# Altium PCB MachIn.PcbDoc
Units mm, origin at the board's own origin, x right, y up, seen from the top; angles counter-clockwise.
Board outline 150.11 x 123.44 mm, 2 copper layers (Top Layer, Bottom Layer); 73 components, 77 nets, 296 pads, 0 vias.
Unrouted connection lines stored in the file: 131.
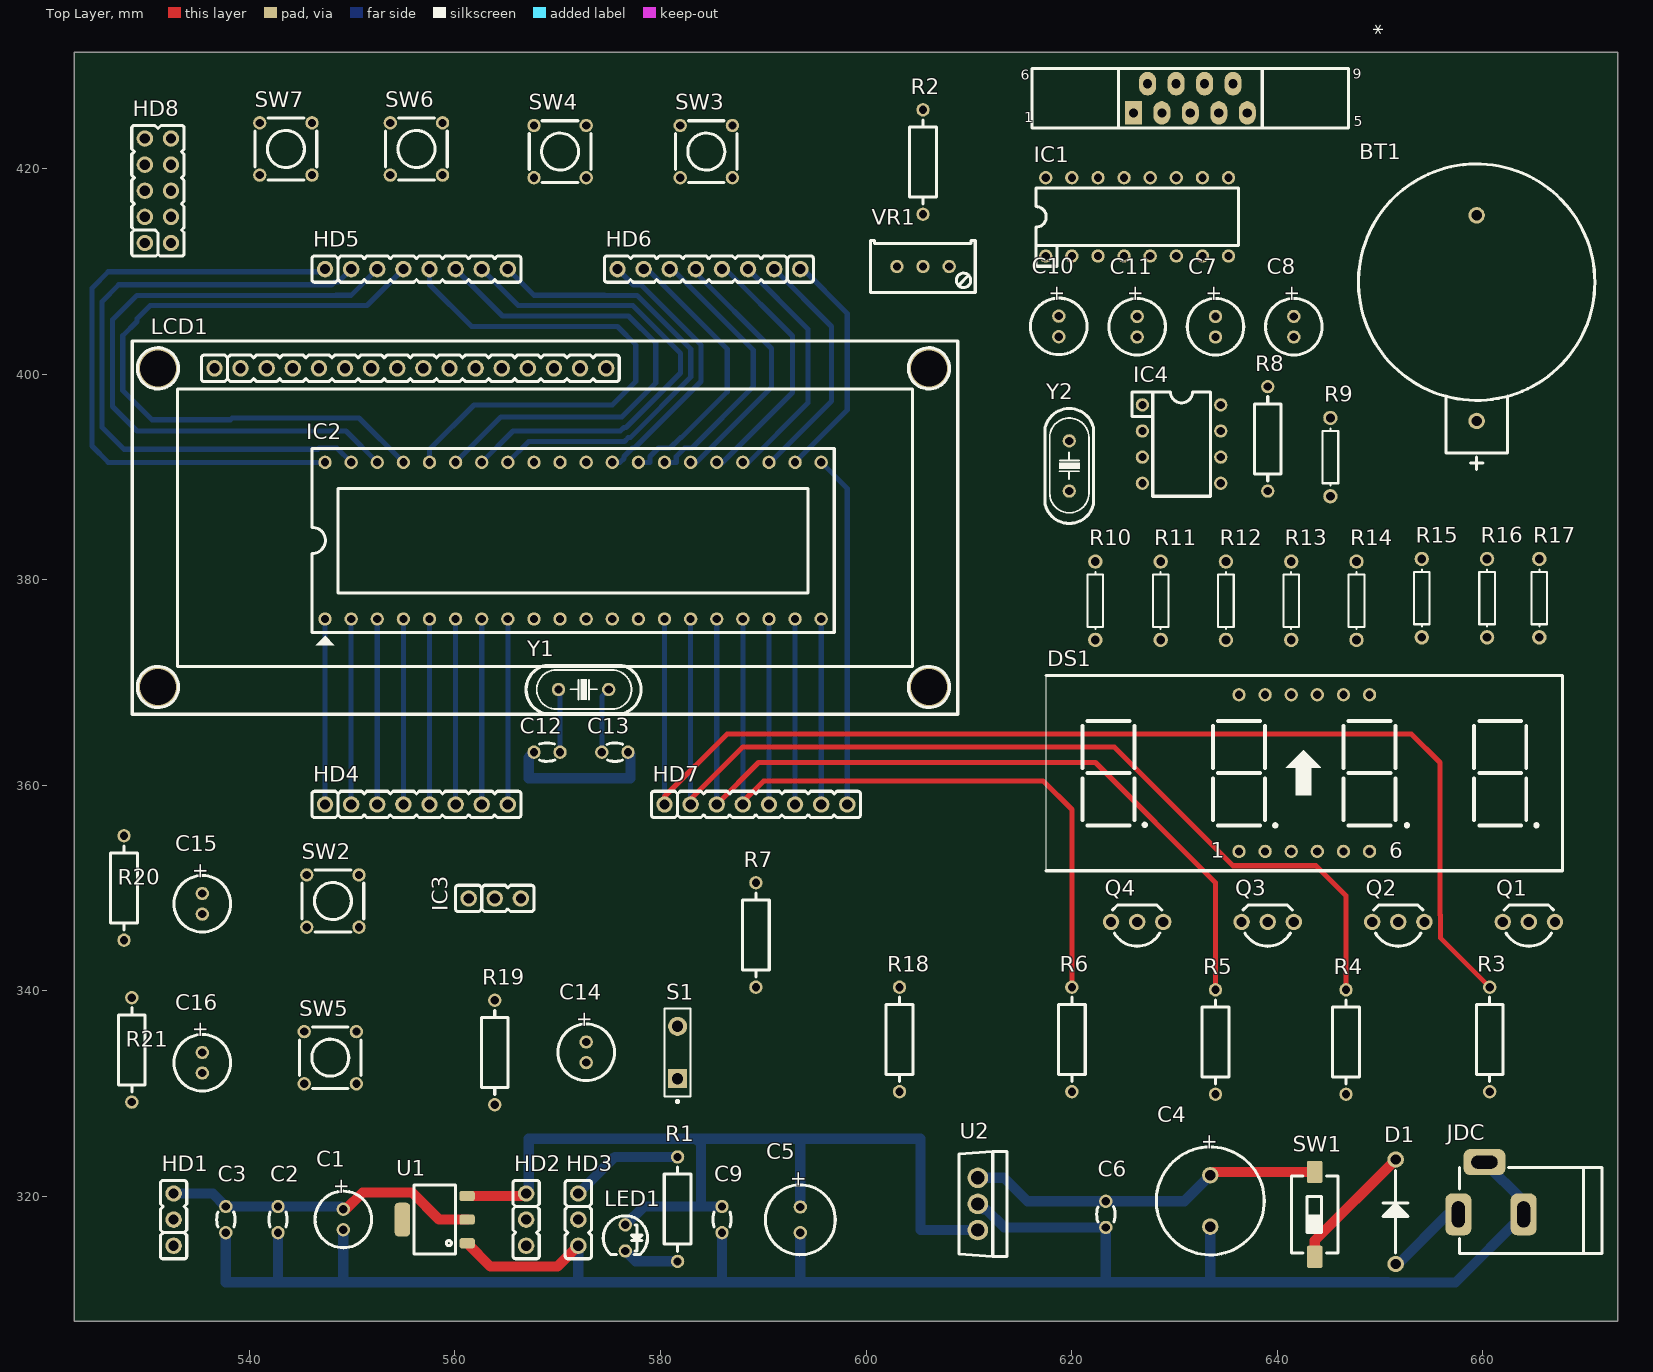
[diagram p0: Top Layer view]
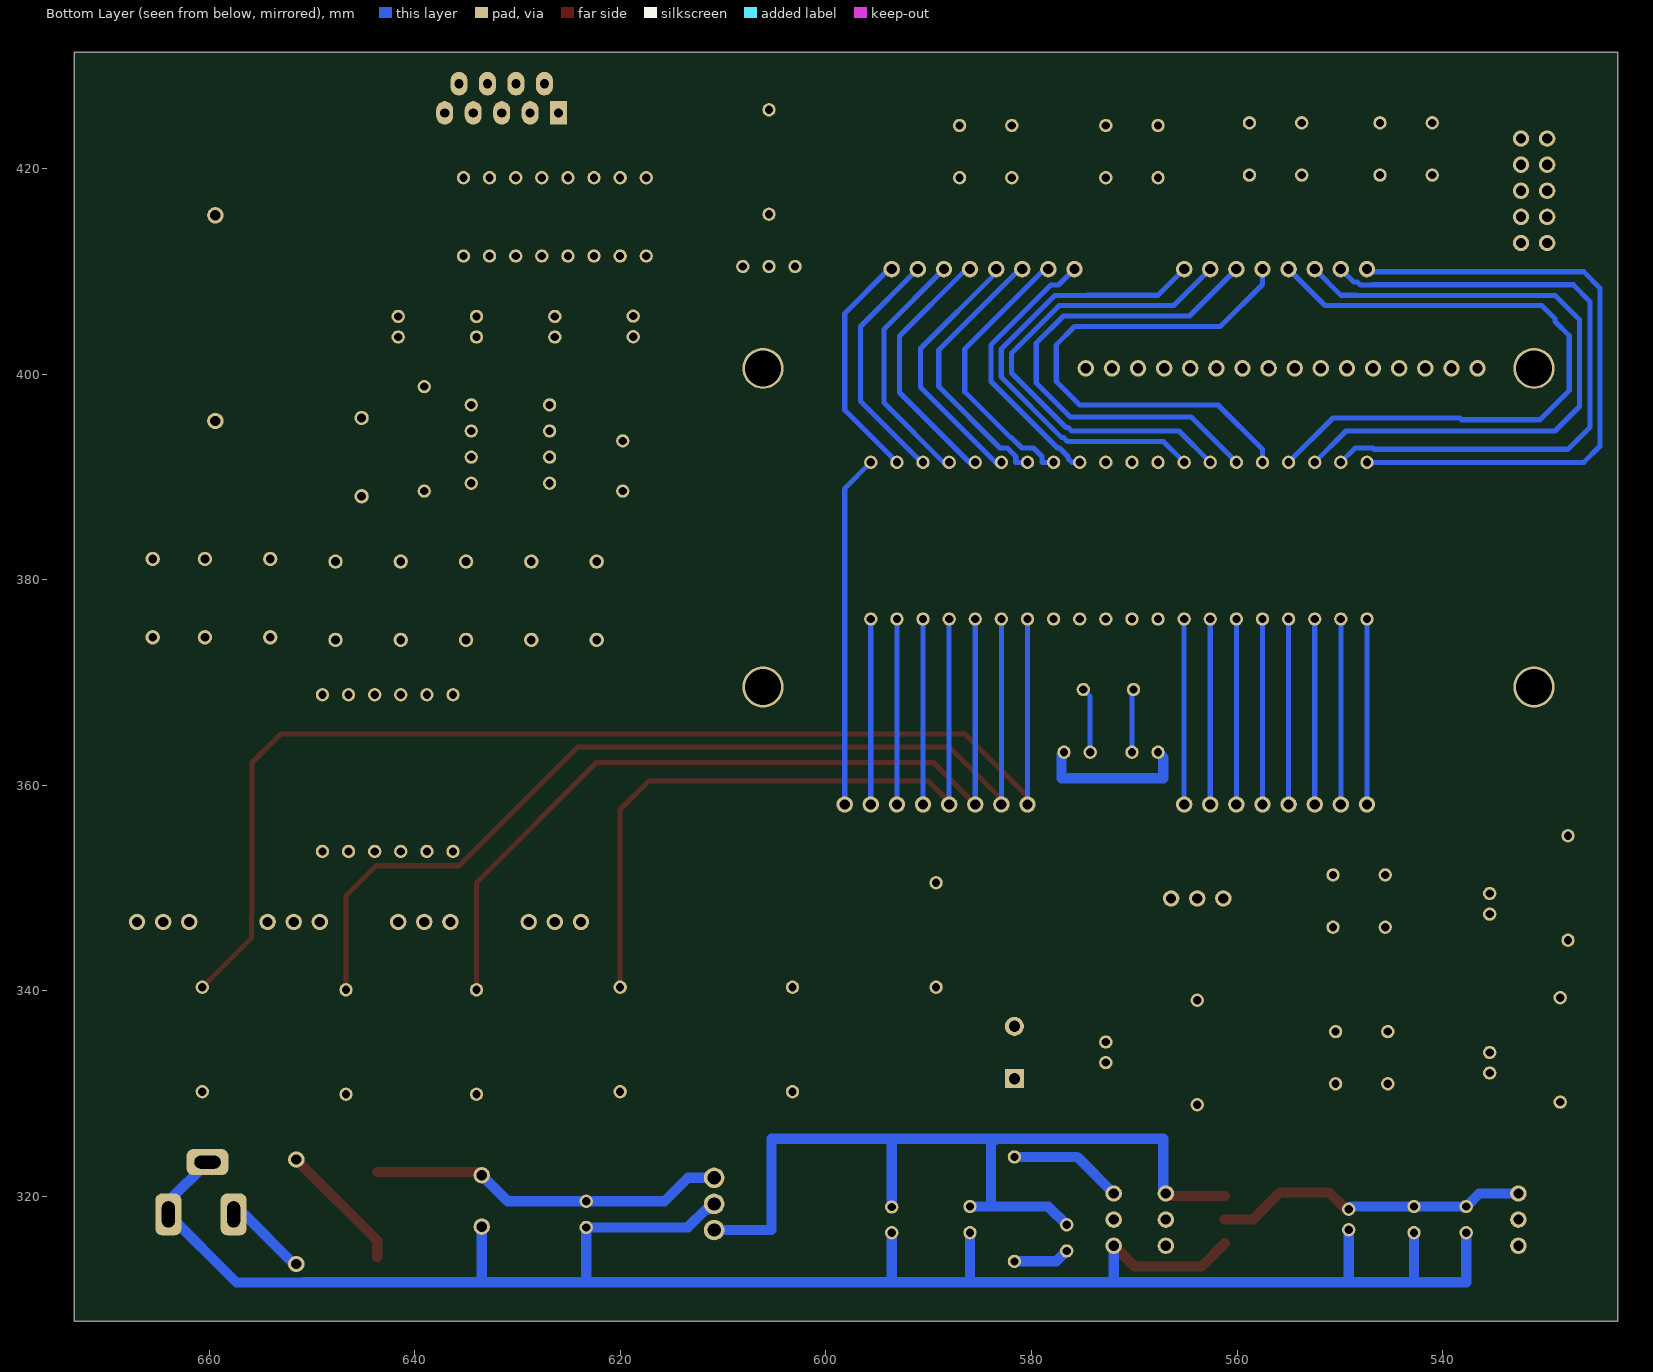
[diagram p1: Bottom Layer view, seen from below]

## Layer stack, top to bottom
Top Solder: solder mask 0.0102, Solder Resist, Dk 3.5
Top Layer: signal copper 0.0356
Dielectric 1: dielectric 0.32, FR-4, Dk 4.8
Bottom Layer: signal copper 0.0356
Bottom Solder: solder mask 0.0102, Solder Resist, Dk 3.5

## Board outline
522.986,307.848 673.1,307.848 673.1,431.292 522.986,431.292

## Design rules (kind name [scope] priority, off if disabled: settings)
Clearance [All] p1: gap=0.5 ignorepadtopadclearanceinfootprint=FALSE
PolygonConnect [All] p1: connectstyle=Relief reliefconductorwidth=0.254 reliefentries=4 polygonreliefangle="90 Angle" airgapwidth=0.254
RoutingVias Via_Power [InNetClass('Net_Power')] p1: holewidth=0.6 width=1.1 viastyle="Through Hole" minholewidth=0.6 minwidth=1.1 maxholewidth=0.6 maxwidth=1.1
RoutingVias Via_Signal [InNetClass('Net_Signal')] p2: holewidth=0.4 width=0.7 viastyle="Through Hole" minholewidth=0.4 minwidth=0.7 maxholewidth=0.4 maxwidth=0.7
SolderMaskExpansion [All] p1: expansion=0.102
Width Net_Signal [InNetClass('Net_Signal')] p1: maxlimit=2 minlimit=0.5 preferedwidth=0.5
Width Net_Power [InNetClass('Net_Power')] p2: maxlimit=2 minlimit=1 preferedwidth=1
Width Default [All] p3: maxlimit=2 minlimit=1 preferedwidth=1
30 further rules are at their usual default settings.

## Classes and differential pairs
net class Net_Signal: MISO MOSI Net*_2 Net*_3 NetBT1_1 NetC4_1 NetC7_1 NetC7_2 NetC8_1 NetC8_2 NetC10_1 NetC11_2 NetC15_1 NetC16_1 NetD1_1 NetD1_2 NetDS1_1 NetDS1_2 NetDS1_3 NetDS1_4 NetDS1_5 NetDS1_6 NetDS1_7 NetDS1_8 NetDS1_9 NetDS1_10 NetDS1_11 NetDS1_12 NetIC3_4 NetIC4_1 NetIC4_2 NetLCD1_3 NetLCD1_15 NetLED1_2 NetQ1_3 NetQ2_3 NetQ3_3 NetQ4_3 PA0 PA1 PA2 PA3 PA4 PA5 PA6 PA7 PB0 PB1 PB2 PB3 PB4 PB5 PB6 PB7 PC2 PC3 PC4 PC5 PC6 PC7 PD4 PD5 PD6 PD7 RESET RXD SCK SCL SDA TXD XTAL1 XTAL2
net class Net_Power: 3.3V GND VCC

## Components (designator, comment, footprint, x,y, rotation, side; value= is the part's Value field where it differs from the comment)
* "COM" "DSB 9-F FIX" 631.535,426.824 r0 top
BT1 "PIN 3V" BS_3_Battery_holder 659.384,408.94 r0 top
C1 "10uF" CAP_10UF_16V 549.148,318.77 r270 top value=10uF/50V
C2 "104" "Tu gom 104" 542.798,317.754 r90 top value=0.1uF
C3 "104" "Tu gom 104" 537.718,317.754 r90 top value=0.1uF
C4 "470uF/50V" CAP_470UF_50V 633.476,322.072 r270 top value=220uF/450V
C5 "100uF" CAP_100UF_25V 593.598,318.984 r270 top value="47uF/16 - 50V"
C6 "5AK102KABAA" "Tu gom 104" 623.316,318.262 r90 top value=104
C7 "10uF" CAP_10UF_50V 633.984,405.606 r270 top value=10uF/50V
C8 "10uF" CAP_10UF_50V 641.604,405.606 r270 top value=10uF/50V
C9 "5AK102KABAA" "Tu gom 104" 585.978,317.754 r90 top value=104
C10 "10uF" CAP_10UF_50V 618.744,405.638 r270 top value=10uF/50V
C11 "10uF" CAP_10UF_50V 626.364,405.606 r270 top value=10uF/50V
C12 "5AK102KABAA" "Tu 33p" 567.69,363.22 r0 top value=22pF
C13 "5AK102KABAA" "Tu 33p" 576.834,363.22 r180 top value=22pF
C14 "1uF" CAP_1UF_50V 572.77,335.026 r270 top value=10uF/50V
C15 "10uF" CAP_10UF_16V 535.432,349.472 r270 top value=10uF/50V
C16 "10uF" CAP_10UF_16V 535.432,334.01 r270 top value=10uF/50V
D1 "1N4007" 1N4007 651.51,313.436 r90 top
DS1 "7SEGQ" 7SEG_4DIGIT 636.27,353.568 r0 top value="LED 7Q SEG"
HD1 "Header 3" Header_3 532.638,317.754 r90 top
HD2 "Header 3" Header_3 566.928,317.754 r270 top
HD3 "Header 3" Header_3 572.008,317.754 r270 top
HD4 "Header 8" Header_8 556.26,358.14 r0 top
HD5 "Header 8" Header_8 556.26,410.21 r0 top
HD6 "Header 8" Header_8 584.708,410.21 r180 top
HD7 "Header 8" Header_8 589.28,358.14 r0 top
HD8 "Header 5x2" HeaderSP_5x2 531.114,417.83 r90 top
IC1 "MAX232" 74HC4017 617.474,411.48 r0 top
IC2 "ATMEGA 16A" PIC16F877A 547.37,376.174 r0 top value="Atmega 16L"
IC3 "DS18B20" Header_FM_3 563.88,348.996 r0 top
IC4 "DS1307" DS1307 626.872,397.002 r270 top
JDC "Jac DC" DC-IN 660.781,320.802 r180 top
LCD1 "LCD 16x2A" LCD16x2 536.614,400.558 r0 top value=LCD16x2A
LED1 "LED_R_3" LED3R 576.58,317.246 r270 top
Q1 "C1815" 2SA1015 664.464,346.71 r180 top
Q2 "C1815" 2SA1015 651.764,346.71 r180 top
Q3 "C1815" 2SA1015 639.064,346.71 r180 top
Q4 "C1815" 2SA1015 626.364,346.71 r180 top
R1 "220" "RES 1/4W CFR25" 581.66,323.85 r270 top value="R1/4W - 1K"
R2 "220" "RES 1/4W CFR25" 605.536,425.704 r270 top value="R1/4W - 1K"
R3 "10k" "RES 1/4W CFR25" 660.654,330.2 r90 top value="R1/4W - 1K"
R4 "10k" "RES 1/4W CFR25" 646.684,329.946 r90 top value="R1/4W - 1K"
R5 "10k" "RES 1/4W CFR25" 633.984,329.946 r90 top value="R1/4W - 1K"
R6 "10k" "RES 1/4W CFR25" 620.014,340.36 r270 top value="R1/4W - 1K"
R7 "10k, 1/4W" "RES 1/4W CFR25" 589.28,340.36 r90 top value="R1/4W - 1K"
R8 "CF1/4W1KJ25" "RES 1/4W CFR25" 639.064,388.62 r90 top value="4.7K, 1/4W"
R9 "CF1/4W1KJ25" AXIAL-0.3 645.16,391.922 r90 top value="4.7K, 1/4W"
R10 "CF1/4W1KJ25" AXIAL-0.3 622.3,377.952 r90 top value=220
R11 "CF1/4W1KJ25" AXIAL-0.3 628.65,377.952 r90 top value=220
R12 "CF1/4W1KJ25" AXIAL-0.3 635,377.952 r90 top value=220
R13 "CF1/4W1KJ25" AXIAL-0.3 641.35,377.952 r90 top value=220
R14 "CF1/4W1KJ25" AXIAL-0.3 647.7,377.952 r90 top value=220
R15 "CF1/4W1KJ25" AXIAL-0.3 654.05,378.206 r90 top value=220
R16 "CF1/4W1KJ25" AXIAL-0.3 660.4,378.206 r90 top value=220
R17 "CF1/4W1KJ25" AXIAL-0.3 665.48,378.206 r270 top value=220
R18 "10k" "RES 1/4W CFR25" 603.25,330.2 r90 top value="R1/4W - 1K"
R19 "CF1/4W220KJ25" "RES 1/4W CFR25" 563.88,328.93 r90 top value=220K
R20 "CF1/4W1KJ25" "RES 1/4W CFR25" 527.812,344.932 r90 top value="1K, 1/4W"
R21 "CF1/4W1KJ25" "RES 1/4W CFR25" 528.574,329.184 r90 top value="1K, 1/4W"
S1 "SW-PB" SPST-2 581.66,334.01 r90 top
SW1 "SW6S" SMD_DIP_Switch1 643.636,318.262 r90 top value=SW6
SW2 "SW" "BUTTON 4 PIN" 548.132,348.742 r0 top value="Button chip 4 pin"
SW3 "SW" "BUTTON 4 PIN" 584.454,421.64 r0 top value="Button chip 4 pin"
SW4 "SW" "BUTTON 4 PIN" 570.23,421.64 r0 top value="Button chip 4 pin"
SW5 "SW" "BUTTON 4 PIN" 547.878,333.502 r0 top value="Button chip 4 pin"
SW6 "SW" "BUTTON 4 PIN" 556.26,421.894 r0 top value="Button chip 4 pin"
SW7 "SW" "BUTTON 4 PIN" 543.56,421.894 r0 top value="Button chip 4 pin"
U1 "AMS1117-3V3" AMS1117-3.3V 558.038,317.754 r180 top
U2 "LM7805" LM7805 610.87,319.278 r270 top
VR1 "10K" VR1 608.076,410.464 r180 top value="VR 10K"
Y1 "16MHz" CRYSTAL 572.516,369.316 r180 top
Y2 "CRYSTAL_32.768KHz" CRYSTAL 619.76,391.06 r270 top

## Footprints (in the part's own frame and the unit in brackets; to place one, negate y for a bottom-side part, rotate by r counter-clockwise, add the part's x,y. Pads: shape width x height; smd on the part's side, far side on the other; paste and mask are expansions set on the pad)
1N4007 [mm] "DIODE_DIP"
  round 1.6 hole 1 mask+0.1: 1(0,0) 2(10.16,0)
  silkscreen extent 1.08,-1.2 9.08,1.21, body extent -0.72,-1.25 10.88,1.25, height 2.75
2SA1015 [mm] "TO-92 Bent Lead, Body Dia. 4.5mm; Leads 0.51 x 0.48 mm (max)"
  round 1.6 hole 1 mask+0.1: 1(-2.54,0) 2(0,0)
  round 1.6 hole 1: 3(2.54,0)
  silkscreen extent -2.41,-1.65 2.41,2.37, body extent -2.79,-1.59 2.79,2.61, height 10
7SEG_4DIGIT [mm] "DIP 12 Leads; Body 50.2 x 19 mm; Pitch 2.54mm"
  round 1.3 hole 0.8: 1(0,0) 2(2.54,0) 3(5.08,0) 4(7.62,0) 5(10.16,0) 6(12.7,0) 7(12.7,15.24) 8(10.16,15.24) 9(7.62,15.24) 10(5.08,15.24) 11(2.54,15.24) 12(0,15.24)
  silkscreen extent -18.75,-1.88 31.45,17.12, body extent -18.75,-1.88 31.55,17.12, height 14.35
74HC4017 [mm] "DIP 16, 16 PIN, W 7.62, Pin to pin 2.54MM"
  round 1.3 hole 0.8: 1(0,0) 2(2.54,0) 3(5.08,0) 4(7.62,0) 5(10.16,0) 6(12.7,0) 7(15.24,0) 8(17.78,0) 9(17.78,7.62) 10(15.24,7.62) 11(12.7,7.62) 12(10.16,7.62) 13(7.62,7.62) 14(5.08,7.62) 15(2.54,7.62) 16(0,7.62)
  silkscreen extent -0.95,-0.99 18.73,6.61, body extent -1.41,-0.07 19.19,7.69, height 4.5
AMS1117-3.3V [mm] "SOT223, 4-Leads, Body 6.7x7.3mm (max), Pitch 2.30mm, IPC Medium Density"
  rrect50% 1.5x1 smd: 1(-3.15,2.3) 2(-3.15,0) 3(-3.15,-2.3)
  rrect50% 1.5x3.28 smd: 4(3.15,0)
  silkscreen extent -2.03,-3.35 2.03,3.35
AXIAL-0.3 [mm] "Axial Device, Thru-Hole; 2 Leads; 0.3 in Pin Spacing"
  round 1.4 hole 0.85: 1(-3.81,0) 2(3.81,0)
  silkscreen extent -2.77,-0.76 2.77,0.76
BS_3_Battery_holder [mm]
  round 1.6 hole 1 mask+0.1: 1(0,-13.5) 2(0,6.5)
  silkscreen extent -11.5,-18.2 11.5,11.5, body extent -11.4,-17.25 11.35,11.45, height 7.07
"BUTTON 4 PIN" [mm]
  round 1.3 hole 0.8: 1(-2.54,2.54) 2(2.54,2.54) 3(-2.54,-2.54) 4(2.54,-2.54)
  silkscreen extent -3,-3 3,3
CAP_1UF_50V [mm] "Capacitor, Electrolytic, Radial; Body 5 x 11 mm (Dia.xH typ); Pin Spacing 2 mm (typ)"
  round 1.3 hole 0.8: 1(0,0) 2(2,0)
  silkscreen extent -1.75,-2.75 3.75,2.75, body extent -1.53,-2.53 3.53,2.53, height 11.53
CAP_10UF_16V [mm] "Capacitor, Electrolytic, Radial; Body 5 x 11 mm (Dia.xH typ); Pin Spacing 2 mm (typ)"
  round 1.3 hole 0.8: 1(0,0) 2(2,0)
  silkscreen extent -1.75,-2.75 3.75,2.75, body extent -1.53,-2.53 3.53,2.53, height 11.53
CAP_10UF_50V [mm] "Capacitor, Electrolytic, Radial; Body 5 x 11 mm (Dia.xH typ); Pin Spacing 2 mm (typ)"
  round 1.3 hole 0.8: 1(0,0) 2(2,0)
  silkscreen extent -1.75,-2.75 3.75,2.75, body extent -1.53,-2.53 3.53,2.53, height 11.53
CAP_100UF_25V [mm] "Capacitor, Electrolytic, Radial; Body 6.3 x 11.2 mm (Dia.xH typ); Pin Spacing 2.5 mm (typ)"
  round 1.3 hole 0.8: 1(0,0) 2(2.5,0)
  silkscreen extent -2.15,-3.4 4.65,3.4, body extent -1.93,-3.18 4.43,3.18, height 11.53
CAP_470UF_50V [mm] "Capacitor, Electrolytic, Radial; Body 10 x 20 mm (Dia.xH typ); Pin Spacing 5 mm (typ)"
  round 1.6 hole 1: 1(0,0) 2(5,0)
  silkscreen extent -2.75,-5.25 7.75,5.25, body extent -2.53,-5.03 7.53,5.03, height 16.53
CRYSTAL [mm] "Quartz Crystal, Thru-Hole; 2 Leads; Body 11.35 x 4.65 x 13.46 mm (LxWxH max)"
  round 1.3 hole 0.8 mask+0.1: 1(-2.44,0) 2(2.44,0)
  silkscreen extent -5.59,-2.35 5.59,2.35, body extent -5.49,-2.25 5.49,2.25, height 3.6
DC-IN [mil] "Jac DC input"
  rrect50% 100x160 hole 50 slot 100 at 90 deg: 1(125,100) 2(-125,100)
  rrect50% 160x100 hole 50 slot 100 at 0 deg: 3(25,-100)
  silkscreen extent -425,-80 120,250, body extent -410,-105 134,269, height 434
DS1307 [mm] "DIP 8, 8 PIN, W 7.62, Pin to pin 2.54MM"
  round 1.3 hole 0.8: 1(0,0) 2(2.54,0) 3(5.08,0) 4(7.62,0) 5(7.62,7.62) 6(5.08,7.62) 7(2.54,7.62) 8(0,7.62)
  silkscreen extent -1.27,-0.99 8.89,6.61, body extent -1.14,-0.1 8.76,7.72, height 4.57
"DSB 9-F FIX" [mil] "COM FMALE - D Subminiature; 9 Position; Right Angle; Pitch 1.385 mm"
  rect 65x90 hole 35: 1(-218.11,-55.91)
  oval 65x90 hole 35: 2(-109.05,-55.91) 3(0,-55.91) 4(109.06,-55.91) 5(218.11,-55.91) 6(-163.58,55.91) 7(-54.53,55.91) 8(54.53,55.91) 9(163.58,55.91)
  silkscreen extent -606,-114 606,114, body extent -604,-138 608,613, height 495
Header_3 [mm] "Connector DIP, 3Pin_2.54mm"
  round 1.6 hole 1 mask+0.1: 1(-2.54,0) 2(0,0) 3(2.54,0)
  silkscreen extent -3.81,-1.28 3.81,1.28, body extent -3.81,-1.27 3.81,1.27, height 10.1
Header_8 [mm] "Connector DIP Male, 8Pin_2.54mm"
  round 1.6 hole 1 mask+0.1: 1(-8.89,0) 2(-6.35,0) 3(-3.81,0) 4(-1.27,0) 5(1.27,0) 6(3.81,0) 7(6.35,0) 8(8.89,0)
  silkscreen extent -10.16,-1.28 10.16,1.28, body extent -10.16,-1.27 10.16,1.27, height 10.1
Header_FM_3 [mm] "Connector DIP, 3Pin_2.54mm"
  round 1.6 hole 1 mask+0.1: 1(-2.54,0) 2(0,0) 3(2.54,0)
  silkscreen extent -3.81,-1.28 3.81,1.28
HeaderSP_5x2 [mm] "Connector DIP FeMale, 2x5Pin_2.54mm"
  round 1.6 hole 1 mask+0.1: 1(-5.08,1.27) 2(-2.54,1.27) 3(0,1.27) 4(2.54,1.27) 5(5.08,1.27) 6(-5.08,-1.27) 7(-2.54,-1.27) 8(0,-1.27) 9(2.54,-1.27) 10(5.08,-1.27)
  silkscreen extent -6.35,-2.55 6.35,2.55
LCD16x2 [mm] "LCD 16x2, 36.3mmx80.3mm"
  round 1.6 hole 1 mask+0.1: 1(0,0) 2(2.54,0) 3(5.08,0) 4(7.62,0) 5(10.16,0) 6(12.7,0) 7(15.24,0) 8(17.78,0) 9(20.32,0) 10(22.86,0) 11(25.4,0) 12(27.94,0) 13(30.48,0) 14(33.02,0) 15(35.56,0) 16(38.1,0)
  round 4 hole 3.5: Hole_0(-5.5,0) Hole_1(-5.5,-31) Hole_3(69.5,-31) Hole_4(69.5,0)
  silkscreen extent -8,-33.65 72.3,2.65, body extent -8.25,-33.75 72.25,2.75, height 10.52
LED3R [mm] "LED 3mm_RED"
  round 1.3 hole 0.8: 1(0,0) 2(2.54,0)
  silkscreen extent -0.88,-2.15 2.87,2.15, body extent -0.73,-2 2.94,2, height 4.6
LM7805 [mm] "POWER IC 7805"
  round 2 hole 1.3: 1(-2.54,0) 2(0,0) 3(2.54,0)
  silkscreen extent -5.1,-1.85 5.1,2.85, body extent -5.56,-1.63 5.65,3.06, height 19.17
PIC16F877A [mm] "40 PIN, W 15.24mm, Pin to pin 2.54mm"
  round 1.3 hole 0.8: 1(0,0) 2(2.54,0) 3(5.08,0) 4(7.62,0) 5(10.16,0) 6(12.7,0) 7(15.24,0) 8(17.78,0) 9(20.32,0) 10(22.86,0) 11(25.4,0) 12(27.94,0) 13(30.48,0) 14(33.02,0) 15(35.56,0) 16(38.1,0) 17(40.64,0) 18(43.18,0) 19(45.72,0) 20(48.26,0) 21(48.26,15.24) 22(45.72,15.24) 23(43.18,15.24) 24(40.64,15.24) 25(38.1,15.24) 26(35.56,15.24) 27(33.02,15.24) 28(30.48,15.24) 29(27.94,15.24) 30(25.4,15.24) 31(22.86,15.24) 32(20.32,15.24) 33(17.78,15.24) 34(15.24,15.24) 35(12.7,15.24) 36(10.16,15.24) 37(7.62,15.24) 38(5.08,15.24) 39(2.54,15.24) 40(0,15.24)
  silkscreen extent -1.28,-2.54 49.54,16.58, body extent -2.08,-0.12 50.37,15.37, height 5.7
"RES 1/4W CFR25" [mm] "Axial Device, Thru-Hole; 2 Leads fi 0.55"
  round 1.3 hole 0.8 mask+0.1: 1(0,0) 2(10.16,0)
  silkscreen extent 0.98,-1.3 9.18,1.3, body extent -0.3,-1.16 10.47,1.16, height 2.93
SMD_DIP_Switch1 [mm] "SMD DIP Switch 2pin, 2.54mm"
  rrect20% 2.15x1.5 smd mask+0.1: 1(-4.125,0) 2(4.125,0)
  silkscreen extent -3.74,-2.26 3.74,2.26
SPST-2 [mm] "Switch; 2 Leads"
  rect 1.85x1.85 hole 1.1: 1(-2.54,0)
  round 1.85 hole 1.1: 2(2.54,0)
  silkscreen extent -4.89,-1.27 4.28,1.27
"Tu 33p" [mm] "Capacitor, Radial, Tantalum, Non-Polarised; Body 3.05 x 1.78 x 3.43 mm (WxTxH max); Pin Spacing 2.54 mm (typ)"
  round 1.3 hole 0.8: 1(0,0) 2(2.54,0)
  silkscreen extent 0.54,-0.89 2.03,0.89, body extent -1.65,-0.85 4.19,0.85, height 6.42
"Tu gom 104" [mm] "Capacitor, Radial, Tantalum, Non-Polarised; Body 3.05 x 1.78 x 3.43 mm (WxTxH max); Pin Spacing 2.54 mm (typ)"
  round 1.3 hole 0.8: 1(-1.27,0) 2(1.27,0)
  silkscreen extent -0.73,-0.89 0.76,0.89, body extent -2.92,-0.85 2.92,0.85, height 6.42
VR1 [mm] "Variable Resistor"
  round 1.3 hole 0.8 mask+0.1: 1(0,0) 2(2.54,0) 3(5.08,0)
  silkscreen extent -2.54,-2.54 7.65,2.54, body extent -2.22,-3.3 7.3,2.79, height 11.56

## Part data
BT1: "Battery 3VDC"
C1 C7 C8 C10 C11 C14 C15 C16: library part CP1, "Cap P  0,1uF < 22uF , 16 - 50V", Description 1="10 => 220uF/6,3V/10V - 10uF => 100uF/16V", Description 2="0,1uF => 33uF/50V - 10uF => 22uF/63V", Description 3="0,47uF => 10uF/100V"
C2 C3: library part CN2, "Cap np 104 => 105pF"
C4: library part CP8, "Cap 4700uF/50V"
C5: library part CP2, "C 47uF/50V , 220uF/16V", Description 1="470uF/6,3V - 330uF/10V - 220uF/16V", Description 2="100uF/25V - 35V - 47uF/50V - 22uF/100V", Description 3="33uF => 47uF/63V - 1uF => 4,7uF/160V", Description 4="1uF => 2,2uF/250V - 1uF/350V"
C6 C9 C12 C13: "CAP NPO CAPNTO 1nF 100V 10%", ComponentLink1Description=Datasheet, ComponentLink1URL="D:\Dropbox\Datasheets\Passive Components\Capacitors\AVX Disc Ceramic Capacitors.pdf", Unit Price=0.003
D1: "Diode LS 1A 1000V DO-41", ComponentLink1Description=Datasheet, ComponentLink1URL="D:\Dropbox\Datasheets\Diodes and Rectifiers\Diodes\1N400X.pdf", Unit Price=0.0072
DS1: library part LED7Q, "Four 7 Seg Dipslay"
HD1 HD2 HD3: library part Hed3, "Header 3 (Green)"
HD4 HD5 HD6 HD7: library part HED8V, "Header 8 Vit Broad"
HD8: library part HED5x2
IC1: "Dual EIA-232 Driver/Receiver"
IC2: library part Atmega16L, "8-Bit AVR Microcontroller with 16K Bytes of In-System Programmable Flash Memory"
IC3: library part DS18S20, "High Precision  1-Wire® Digital Thermometer"
IC4: "Real Timer Serial"
JDC: library part DCIN, "Jac DC input"
LCD1: library part LCD16x2A, "LCD dipslay 16 char, 2 line"
LED1: library part LED_RED_3MM, "LED Red 3mm", ComponentLink1Description=Datasheet, ComponentLink1URL="D:\Dropbox\Datasheets\Opto and Illumination\LEDs\SMD LED.pdf", Unit Price=0.0476
Q1 Q2 Q3 Q4: "NPN 600mW, ECB", =C2383
R1 R2 R3 R4 R5 R6 R7 R18: library part R1/4W, "Resistor 1/4W"
R8 R9 R10 R11 R12 R13 R14 R15 R16 R17 R20 R21: "RES CF AXIAL-0.3 5% 1/4W 1K", ComponentLink1Description=Datasheet, ComponentLink1URL="D:\Dropbox\Datasheets\Passive Components\Resistors\Carbon Film Resistor.pdf", Unit Price=0.001
R19: "RES CF AXIAL-0.3 5% 1/4W 220K", ComponentLink1Description=Datasheet, ComponentLink1URL="D:\Dropbox\Datasheets\Passive Components\Resistors\Carbon Film Resistor.pdf", Unit Price=0.001
S1: "Switch", LatestRevisionDate=17-Jul-2002, LatestRevisionNote="Re-released for DXP Platform.", PackageDescription="Switch; 2 Leads", PackageReference=SPST-2, Published=24-Mar-1999, Publisher="Altium Limited"
SW1: "SW-DTDP - 6 Pin"
SW2 SW3 SW4 SW5 SW6 SW7: library part SW4, "Switch button 4 pin"
U1: "Linear Voltage Regulator 3.3V 1A 15V Max SOT-223", ComponentLink1Description=Datasheet, ComponentLink1URL="D:\Dropbox\Datasheets\Power Management ICs\Linear Regulators\AMS1117.pdf", Unit Price=0.2000
U2: "Linear Voltage Regulator 5V 1A 24V Max TO-220", ComponentLink1Description=Datasheet, ComponentLink1URL="D:\Dropbox\Datasheets\Power Management ICs\Linear Regulators\LM78XX.pdf", Unit Price=0.3000
VR1: library part VR, "Var Resistor"
Y1 Y2: library part XTAL_12MHz, "Crystal Oscillator", LatestRevisionDate=17-Jul-2002, LatestRevisionNote="Re-released for DXP Platform.", PackageDescription="Crystal, Thru-Hole; 2 Leads; Body 3.1 x 8.2 mm (Dia.xH)", PackageReference=R38, Published=8-Jun-2000, Publisher="Altium Limited"

## Nets (pads, with @x,y where several pads share a name; then routed paths per layer and width w, separated by ;. In a path a pad name is that pad's centre, name@x,y a point inside that pad or via, vN(x,y) a via of type N, cw(c..) or ccw(c..) an arc to the next point about the centre after c; other vN are vias at no path point)
3.3V: C1.1 C2.2 C3.2 HD1.1 HD1.2 HD1.3 U1.2 | length 30.9
  Top Layer w1: C1.1 549.402,318.77 551.026,320.394 555.833,320.394 558.473,317.754 U1.2
  Bottom Layer w1: HD1.3 536.448,320.294 C3.2 C2.2 548.894,319.024 C1.1
AREF: IC2.32
AVCC: IC2.30
GND: *.5 BT1.2 C1.2 C2.1 C3.1 C4.2 C5.2 C6.1 C9.1 C11.1 C12.1 C13.1 C14.2 C15.2 C16.2 HD3.1 HD3.2 HD3.3 HD7.3 HD7.4 HD8.4 HD8.6 HD8.8 HD8.10 IC1.15 IC2.11 IC2.16 IC2.17 IC2.31 IC4.4 JDC.2 JDC.3 LCD1.1 LCD1.16 R1.1 R5.2 R6.2 R19.1 S1.1 SW2.2 SW2.4 SW3.2 SW3.4 SW4.2 SW4.4 SW5.2 SW5.4 SW6.2 SW6.4 SW7.2 SW7.4 U1.1 U2.2 VR1.3 | length 329
  Top Layer w0.5: HD7.3 589.534,362.204 622.3,362.204 633.984,350.52 R5.2
  Top Layer w1: U1.1 563.46,313.182 569.976,313.182 HD3.3
  Bottom Layer w0.5: HD7.3 IC2.16 ; HD7.4 IC2.17
  Bottom Layer w1: C3.1 537.718,311.658 542.798,311.658 ; C2.1 542.798,311.658 ; C1.2 549.148,311.658 ; C12.1 567.182,362.712 567.182,360.68 577.088,360.68 577.088,362.966 C13.1 ; HD3.3 572.008,311.658 ; HD3.1 575.564,323.85 R1.1 ; C9.1 585.978,311.658 ; C5.2 593.598,311.658 ; U2.2 611.41,318.738 611.698,318.738 613.444,316.992 C6.1 623.316,311.658 ; C4.2@633.396,316.992 C4.2 633.476,311.658 ; JDC.3@660.527,323.723 JDC.3 663.956,319.532 JDC.2 657.33,311.636 650.764,311.636 650.742,311.658 633.476,311.658 ; 542.798,311.658 549.148,311.658 ; 549.148,311.658 572.008,311.658 ; 572.008,311.658 585.978,311.658 ; 585.978,311.658 593.598,311.658 ; 593.598,311.658 623.316,311.658 ; 623.316,311.658 633.476,311.658
MISO: HD4.7 HD8.9 IC2.7 | length 18
  Bottom Layer w0.5: HD4.7 IC2.7
MOSI: HD4.6 HD8.1 IC2.6 | length 18.2
  Top Layer w0.5: IC2.6@559.948,376.174 IC2.6
  Bottom Layer w0.5: HD4.6 IC2.6
Net*_2: *.2 IC1.14
Net*_3: *.3 IC1.13
NetBT1_1: BT1.1 IC4.3
NetC4_1: C4.1 C6.2 SW1.2 U2.1 | length 34.9
  Top Layer w1: C4.1 633.791,322.387 SW1.2
  Bottom Layer w1: U2.1 613.41,321.818 615.696,319.532 C6.2 630.936,319.532 C4.1
NetC7_1: C7.1 IC1.1
NetC7_2: C7.2 IC1.3
NetC8_1: C8.1 IC1.4
NetC8_2: C8.2 IC1.5
NetC10_1: C10.1 IC1.2
NetC11_2: C11.2 IC1.6
NetC15_1: C15.1 R20.1 SW2.1 SW2.3
NetC16_1: C16.1 R21.1 SW5.1 SW5.3
NetD1_1: D1.1 JDC.1 | length 8.1
  Bottom Layer w1: D1.1 651.764,313.436 656.59,318.262 JDC.1
NetD1_2: D1.2 SW1.1 | length 12.7
  Top Layer w1: SW1.1 643.636,315.722 D1.2
NetDS1_1: DS1.1 R14.2
NetDS1_2: DS1.2 R13.2
NetDS1_3: DS1.3 R17.2
NetDS1_4: DS1.4 R12.2
NetDS1_5: DS1.5 R16.2
NetDS1_6: DS1.6 Q4.1
NetDS1_7: DS1.7 R11.2
NetDS1_8: DS1.8 Q3.1
NetDS1_9: DS1.9 Q2.1
NetDS1_10: DS1.10 R15.2
NetDS1_11: DS1.11 R10.2
NetDS1_12: DS1.12 Q1.1
NetIC3_4: R7.1
NetIC4_1: IC4.1 Y2.1
NetIC4_2: IC4.2 Y2.2
NetLCD1_3: LCD1.3 VR1.2
NetLCD1_15: LCD1.15 R2.1
NetLED1_2: LED1.2 R1.2 | length 5.5
  Bottom Layer w1: LED1.2 577.596,313.69 R1.2
NetQ1_3: Q1.3 R3.1
NetQ2_3: Q2.3 R4.1
NetQ3_3: Q3.3 R5.1
NetQ4_3: Q4.3 R6.1 | length 51.5
  Top Layer w0.5: 587.883,358.267 590.042,360.426 617.22,360.426 620.014,357.632 R6.1
PA0: HD5.1 IC2.40 R10.1 | length 62.5
  Bottom Layer w0.5: IC2.40@547.116,391.16 IC2.40 526.288,391.414 524.69,393.012 524.69,408.358 526.288,409.956 547.116,409.956 HD5.1
PA1: HD5.2 IC2.39 R11.1 | length 63.5
  Bottom Layer w0.5: IC2.39 548.51,392.814 546.79,392.814 546.66,392.684 527.812,392.684 525.69,394.806 525.69,407.072 527.304,408.686 546.702,408.686 546.728,408.66 548.012,408.66 548.292,408.94 548.64,408.94 HD5.2
PA2: HD5.3 IC2.38 R12.1 | length 64.2
  Bottom Layer w0.5: IC2.38 549.402,394.462 529.082,394.462 526.69,396.854 526.69,405.278 529.072,407.66 548.426,407.66 548.436,407.67 549.91,407.67 HD5.3
PA3: HD5.4 IC2.37 R13.1 | length 65.8
  Bottom Layer w0.5: IC2.37 550.672,395.732 538.339,395.732 538.161,395.554 530.53,395.554 527.69,398.394 527.69,403.729 529.082,405.121 529.082,405.384 530.358,406.66 551.44,406.66 HD5.4
PA4: HD5.5 IC2.36 R14.1 | length 51.6
  Bottom Layer w0.5: IC2.36 557.53,392.687 561.845,397.002 575.31,397.002 577.596,399.288 577.596,402.844 575.818,404.622 561.633,404.622 557.53,408.725 HD5.5
PA5: HD5.6 IC2.35 R15.1 | length 49.5
  Bottom Layer w0.5: IC2.35 564.47,395.814 576.229,395.814 579.539,399.123 579.539,403.009 576.887,405.66 564.62,405.66 HD5.6 HD5.6@560.07,409.702
PA6: HD5.7 IC2.34 R16.1 | length 47.6
  Bottom Layer w0.5: IC2.34 565.658,394.462 576.09,394.462 576.442,394.814 576.644,394.814 581.946,400.116 581.946,402.016 577.302,406.66 566.16,406.66 HD5.7
PA7: HD5.8 IC2.33 R17.1 | length 45
  Bottom Layer w0.5: IC2.33 567.182,393.446 576.488,393.446 576.856,393.814 577.058,393.814 582.946,399.702 582.946,402.43 577.716,407.66 574.548,407.66 574.548,407.67 567.69,407.67 HD5.8
PB0: HD4.1 IC2.1 LCD1.4 | length 18
  Bottom Layer w0.5: HD4.1 IC2.1
PB1: HD4.2 IC2.2 LCD1.5 | length 18
  Bottom Layer w0.5: HD4.2 IC2.2
PB2: HD4.3 IC2.3 LCD1.6 | length 18
  Bottom Layer w0.5: HD4.3 IC2.3
PB3: HD4.4 IC2.4 | length 18
  Bottom Layer w0.5: HD4.4 IC2.4
PB4: HD4.5 IC2.5 LCD1.11 | length 18
  Bottom Layer w0.5: HD4.5 IC2.5
PB5: LCD1.12
PB6: LCD1.13
PB7: LCD1.14
PC2: HD6.3 IC2.24 | length 24.4
  Bottom Layer w0.5: IC2.24 588.29,391.134 594.36,397.204 594.36,404.368 HD6.3
PC3: HD6.4 IC2.25 | length 25.7
  Bottom Layer w0.5: IC2.25 585.978,391.414 585.978,391.362 592.836,398.22 592.836,403.7 HD6.4@586.486,410.05 ; HD6.4 HD6.4@586.326,410.21 ; HD6.4@586.279,410.257 HD6.4@586.326,410.21 ; HD6.4@586.326,410.21 HD6.4@586.486,410.05 ; HD6.4@586.326,410.21 586.486,410.21 HD6.4@586.486,410.05
PC4: HD6.5 IC2.26 | length 25.4
  Bottom Layer w0.5: IC2.26 583.49,391.414 590.804,398.728 590.804,402.48 583.438,409.846 HD6.5
PC5: HD6.6 IC2.27 | length 27
  Bottom Layer w0.5: IC2.27 581.53,391.414 581.53,391.994 582.35,392.814 583.06,392.814 589.026,398.78 589.026,402.336 581.152,410.21 HD6.6
PC6: HD6.7 IC2.28 | length 27.2
  Bottom Layer w0.5: IC2.28 578.99,391.414 578.99,391.994 579.81,392.814 580.936,392.814 581.936,393.814 582.028,393.814 586.486,398.272 586.486,402.43 HD6.7@578.532,410.384
PC7: HD6.8 IC2.29 | length 27
  Bottom Layer w0.5: IC2.29 576.072,391.414 576.45,391.792 576.45,391.994 577.27,392.814 577.472,392.814 583.946,399.288 583.946,402.844 578.13,408.66 577.368,408.66 HD6.8 HD6.8@576.072,410.21
PD4: HD7.5 IC2.18 SW3.1 SW3.3 | length 18
  Bottom Layer w0.5: HD7.5 IC2.18
PD5: HD7.6 IC2.19 SW4.1 SW4.3 | length 18
  Bottom Layer w0.5: HD7.6 IC2.19
PD6: HD7.7 IC2.20 SW6.1 SW6.3 | length 18
  Bottom Layer w0.5: HD7.7 IC2.20
PD7: HD7.8 IC2.21 SW7.1 SW7.3 | length 34.3
  Bottom Layer w0.5: IC2.21 598.17,388.874 HD7.8
RESET: C14.1 HD8.5 IC2.9 R18.1 R19.2 S1.2
RXD: HD7.1 IC1.12 IC2.14 R3.2 | length 121.8
  Top Layer w0.5: HD7.1 580.39,358.902 586.486,364.998 653.034,364.998 655.828,362.204 655.828,347.404 655.854,347.378 655.854,345.16 R3.2
  Bottom Layer w0.5: HD7.1 IC2.14
SCK: HD4.8 HD8.7 IC2.8 | length 18
  Bottom Layer w0.5: HD4.8 IC2.8
SCL: HD6.1 IC2.22 IC4.6 R9.1 | length 22.9
  Bottom Layer w0.5: IC2.22 598.17,396.494 598.17,405.892 593.852,410.21 HD6.1
SDA: HD6.2 IC2.23 IC4.5 R8.1 | length 24.2
  Bottom Layer w0.5: IC2.23 590.694,391.414 596.646,397.366 596.646,404.622 HD6.2 HD6.2@591.566,410.21
TXD: HD7.2 IC1.11 IC2.15 R4.2 | length 99.8
  Top Layer w0.5: HD7.2@582.93,357.886 HD7.2 582.93,358.648 588.01,363.728 624.13,363.728 635.69,352.168 643.766,352.168 646.684,349.25 R4.2
  Bottom Layer w0.5: HD7.2 IC2.15
VCC: C5.1 C9.2 C10.2 HD2.1 HD2.2 HD2.3 HD8.2 IC1.16 IC2.10 IC3.3 IC4.8 LCD1.2 LED1.1 Q1.2 Q2.2 Q3.2 Q4.2 R2.2 R7.2 R8.2 R9.2 R18.2 R20.2 R21.2 U1.3 U2.3 VR1.1 | length 87.5
  Top Layer w1: U1.3 566.688,320.054 HD2.1 ; C9.2 C9.2@586.018,318.984
  Bottom Layer w1: HD2.1 567.182,320.548 567.182,325.628 583.438,325.628 ; LED1.1 578.358,319.024 583.946,319.024 ; C9.2 583.946,319.024 ; C5.1 593.598,325.628 ; U2.3 605.282,316.738 605.282,325.628 593.598,325.628 ; 583.438,325.628 593.598,325.628 ; 583.438,325.628 583.946,325.12 583.946,319.024
XTAL1: C13.2 IC2.13 Y1.1 | length 6.4
  Bottom Layer w0.5: C13.2 574.294,368.654 Y1.1
XTAL2: C12.2 IC2.12 Y1.2 | length 6.4
  Top Layer w0.5: C12.2@570.076,363.374 C12.2
  Bottom Layer w0.5: Y1.2 570.23,369.162 C12.2
pads on no net: *.1 *.4 *.6 *.7 *.8 *.9 HD8.3 IC1.7 IC1.8 IC1.9 IC1.10 IC3.1 IC3.2 IC4.7 LCD1.7 LCD1.8 LCD1.9 LCD1.10 LCD1.Hole_0 LCD1.Hole_1 LCD1.Hole_3 LCD1.Hole_4 U1.4

## Silkscreen, mask and mechanical layers (free items; w line width, h text height)
Mechanical 13:
  the board outline again, w2

## Text inside footprints (layer, text, board x,y; h text height)
*: Top Overlay "6" at 615.035,428.624 h1; Top Overlay "9" at 647.335,428.724 h1; Top Overlay "5" at 647.435,424.124 h1; Top Overlay "1" at 615.362,424.483 h1; Mechanical 1 "6" at 627.135,427.824 h1; Mechanical 1 "9" at 635.335,427.824 h1; Mechanical 1 "5" at 636.735,424.924 h1; Mechanical 1 "1" at 625.835,424.724 h1; Mechanical 1 "CN?" at 631.535,426.824 h1
C1: Top Overlay "+" at 548.386,321.834 h1.5 r270; Mechanical 1 "+" at 548.648,320.27 h1 r270; Mechanical 1 "1" at 548.648,318.97 h1 r270; Mechanical 1 "2" at 548.648,317.07 h1 r270
C4: Top Overlay "+" at 632.776,326.172 h1.5 r270; Mechanical 1 "2" at 632.876,317.372 h1.2 r270; Mechanical 1 "1" at 632.876,322.272 h1.2 r270; Mechanical 1 "+" at 632.776,324.272 h1.5 r270
C5: Top Overlay "+" at 592.798,322.534 h1.5 r270; Mechanical 1 "2" at 593.098,316.834 h1 r270; Mechanical 1 "1" at 593.098,319.134 h1 r270; Mechanical 1 "+" at 593.098,320.634 h1 r270
C7: Top Overlay "+" at 633.222,408.67 h1.5 r270; Mechanical 1 "2" at 633.484,403.906 h1 r270; Mechanical 1 "1" at 633.484,405.806 h1 r270; Mechanical 1 "+" at 633.484,407.106 h1 r270
C8: Top Overlay "+" at 640.842,408.67 h1.5 r270; Mechanical 1 "2" at 641.104,403.906 h1 r270; Mechanical 1 "1" at 641.104,405.806 h1 r270; Mechanical 1 "+" at 641.104,407.106 h1 r270
C10: Top Overlay "+" at 617.982,408.702 h1.5 r270; Mechanical 1 "2" at 618.244,403.938 h1 r270; Mechanical 1 "1" at 618.244,405.838 h1 r270; Mechanical 1 "+" at 618.244,407.138 h1 r270
C11: Top Overlay "+" at 625.602,408.67 h1.5 r270; Mechanical 1 "2" at 625.864,403.906 h1 r270; Mechanical 1 "1" at 625.864,405.806 h1 r270; Mechanical 1 "+" at 625.864,407.106 h1 r270
C14: Top Overlay "+" at 572.008,338.09 h1.5 r270; Mechanical 1 "2" at 572.27,333.326 h1 r270; Mechanical 1 "1" at 572.27,335.226 h1 r270; Mechanical 1 "+" at 572.27,336.526 h1 r270
C15: Top Overlay "+" at 534.67,352.536 h1.5 r270; Mechanical 1 "+" at 534.932,350.972 h1 r270; Mechanical 1 "1" at 534.932,349.672 h1 r270; Mechanical 1 "2" at 534.932,347.772 h1 r270
C16: Top Overlay "+" at 534.67,337.074 h1.5 r270; Mechanical 1 "+" at 534.932,335.51 h1 r270; Mechanical 1 "1" at 534.932,334.21 h1 r270; Mechanical 1 "2" at 534.932,332.31 h1 r270
DS1: Top Overlay "6" at 650.875,352.908 h1.52; Top Overlay "1" at 633.527,352.958 h1.52; Mechanical 1 "6" at 650.88,352.908 h1.2; Mechanical 1 "1" at 633.532,352.959 h1.2; Mechanical 1 "7" at 650.494,368.249 h1.2; Mechanical 1 "12" at 632.993,368.173 h1.2
HD1: Mechanical 1 "1" at 532.892,314.96 h1.2 r90; Mechanical 1 "3" at 532.892,320.04 h1.2 r90; Mechanical 1 "HD?" at 532.588,317.804 h0.8 r90
HD2: Mechanical 1 "1" at 566.674,320.548 h1.2 r270; Mechanical 1 "3" at 566.674,315.468 h1.2 r270; Mechanical 1 "HD?" at 566.978,317.704 h0.8 r270
HD3: Mechanical 1 "1" at 571.754,320.548 h1.2 r270; Mechanical 1 "3" at 571.754,315.468 h1.2 r270; Mechanical 1 "HD?" at 572.058,317.704 h0.8 r270
HD4: Mechanical 1 "1" at 547.16,357.74 h1.2; Mechanical 1 "8" at 564.86,357.74 h1.2; Mechanical 1 "HD?" at 556.31,358.19 h0.8
HD5: Mechanical 1 "1" at 547.16,409.81 h1.2; Mechanical 1 "8" at 564.86,409.81 h1.2; Mechanical 1 "HD?" at 556.31,410.26 h0.8
HD6: Mechanical 1 "1" at 593.808,410.61 h1.2 r180; Mechanical 1 "8" at 576.108,410.61 h1.2 r180; Mechanical 1 "HD?" at 584.658,410.16 h0.8 r180
HD7: Mechanical 1 "1" at 580.18,357.74 h1.2; Mechanical 1 "8" at 597.88,357.74 h1.2; Mechanical 1 "HD?" at 589.33,358.19 h0.8
HD8: Mechanical 1 "6" at 532.784,412.58 h1.2 r90; Mechanical 1 "10" at 532.784,422.38 h1.2 r90; Mechanical 1 "5" at 530.214,422.63 h1.2 r90; Mechanical 1 "1" at 530.244,412.58 h1.2 r90
IC1: Mechanical 1 "16" at 617.124,417.29 h1; Mechanical 1 "9" at 634.934,417.17 h1; Mechanical 1 "8" at 634.774,412.35 h1; Mechanical 1 "1" at 617.224,412.39 h1
IC2: Mechanical 1 "1" at 547.2,376.894 h1; Mechanical 1 "20" at 594.8,376.794 h1; Mechanical 1 "21" at 595,389.794 h1; Mechanical 1 "40" at 546.4,389.794 h1
IC3: Mechanical 1 "3" at 566.166,348.742 h1.2; Mechanical 1 "1" at 561.086,348.742 h1.2
IC4: Mechanical 1 "1" at 627.782,397.192 h1 r270; Mechanical 1 "4" at 627.782,389.692 h1 r270; Mechanical 1 "5" at 632.682,389.692 h1 r270; Mechanical 1 "8" at 632.682,397.292 h1 r270
LCD1: Mechanical 1 "16" at 574.164,400.158 h1.2; Mechanical 1 "1" at 536.464,400.158 h1.2
Q1: Mechanical 1 "B" at 662.178,347.091 h0.8 r180; Mechanical 1 "C" at 664.718,347.091 h0.8 r180; Mechanical 1 "E" at 667.258,347.091 h0.8 r180
Q2: Mechanical 1 "B" at 649.478,347.091 h0.8 r180; Mechanical 1 "C" at 652.018,347.091 h0.8 r180; Mechanical 1 "E" at 654.558,347.091 h0.8 r180
Q3: Mechanical 1 "B" at 636.778,347.091 h0.8 r180; Mechanical 1 "C" at 639.318,347.091 h0.8 r180; Mechanical 1 "E" at 641.858,347.091 h0.8 r180
Q4: Mechanical 1 "B" at 624.078,347.091 h0.8 r180; Mechanical 1 "C" at 626.618,347.091 h0.8 r180; Mechanical 1 "E" at 629.158,347.091 h0.8 r180
R1: Mechanical 1 "R?" at 581.66,323.77 h0.5 r270
R2: Mechanical 1 "R?" at 605.536,425.624 h0.5 r270
R3: Mechanical 1 "R?" at 660.654,330.28 h0.5 r90
R4: Mechanical 1 "R?" at 646.684,330.026 h0.5 r90
R5: Mechanical 1 "R?" at 633.984,330.026 h0.5 r90
R6: Mechanical 1 "R?" at 620.014,340.28 h0.5 r270
R7: Mechanical 1 "R?" at 589.28,340.44 h0.5 r90
R8: Mechanical 1 "R?" at 639.064,388.7 h0.5 r90
R18: Mechanical 1 "R?" at 603.25,330.28 h0.5 r90
R19: Mechanical 1 "R?" at 563.88,329.01 h0.5 r90
R20: Mechanical 1 "R?" at 527.812,345.012 h0.5 r90
R21: Mechanical 1 "R?" at 528.574,329.264 h0.5 r90
SW1: Mechanical 1 "ON" at 644.236,321.137 h0.8 r180; Mechanical 1 "1" at 643.736,316.237 h0.8 r180
U1: Mechanical 1 "3" at 559.613,319.644 h1.2 r90; Mechanical 1 "2" at 559.613,317.439 h1.2 r90; Mechanical 1 "1" at 559.613,315.234 h1.2 r90
U2: Mechanical 1 "I" at 612.394,321.945 h1.2 r270; Mechanical 1 "G" at 612.394,319.659 h1.2 r270; Mechanical 1 "O" at 612.394,317.119 h1.2 r270
VR1: Mechanical 1 "3" at 603.306,410.974 h1 r180; Mechanical 1 "2" at 605.836,410.994 h1 r180; Mechanical 1 "1" at 608.216,410.954 h1 r180